# EAGLE board IR_Board (EAGLE 7.2.0)
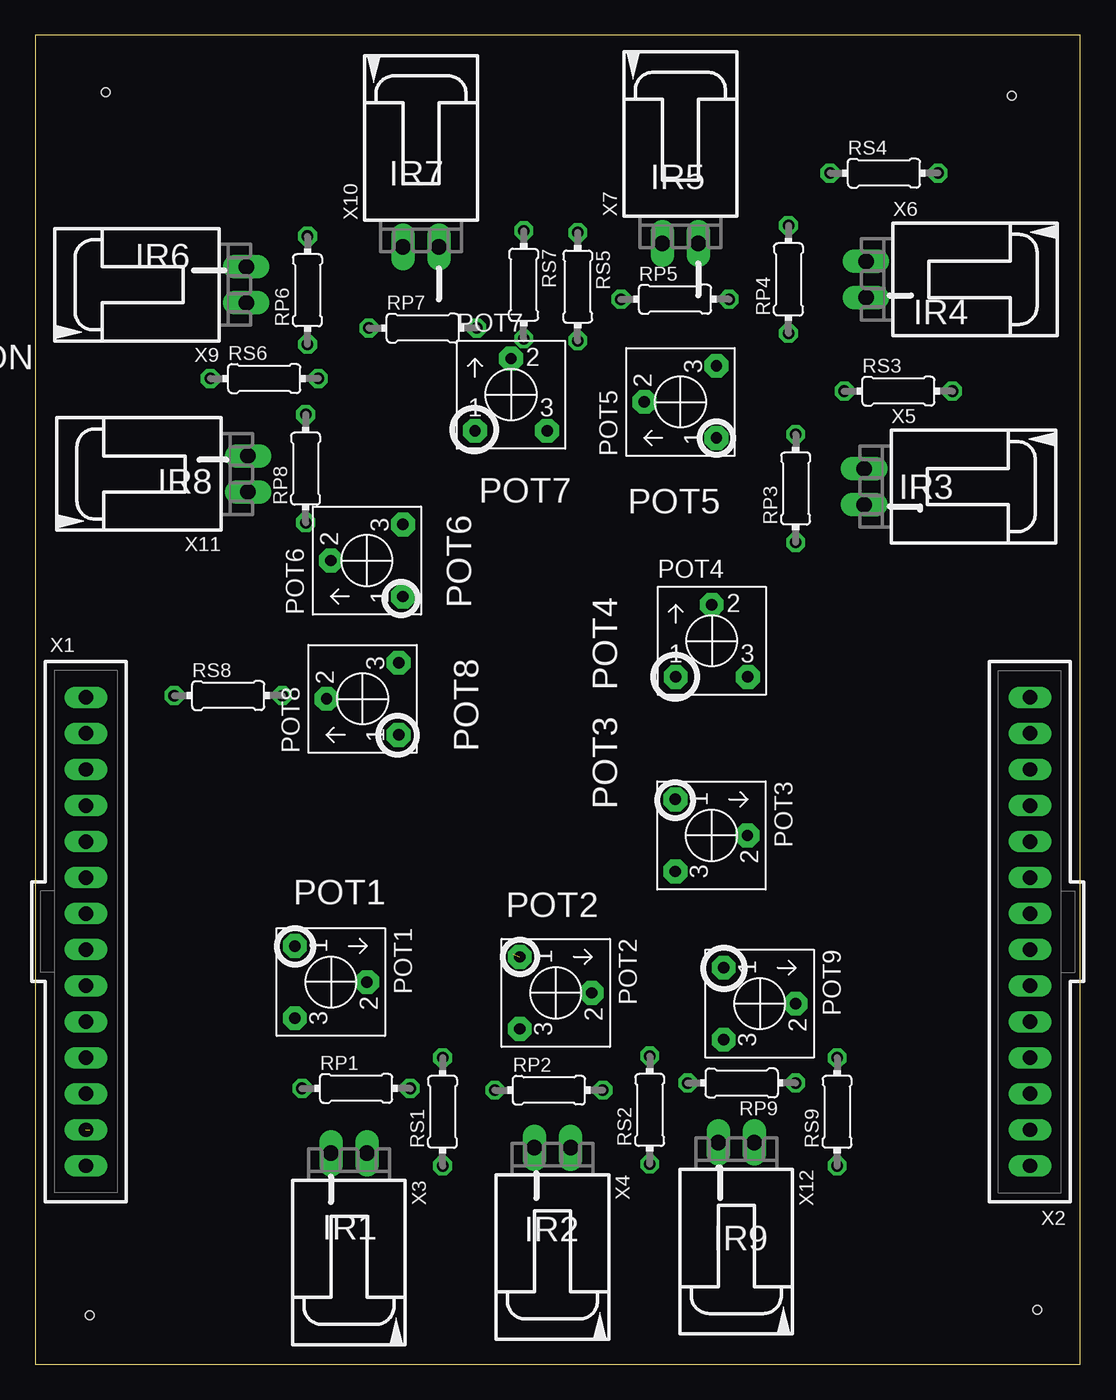
[diagram p0: board, top side]
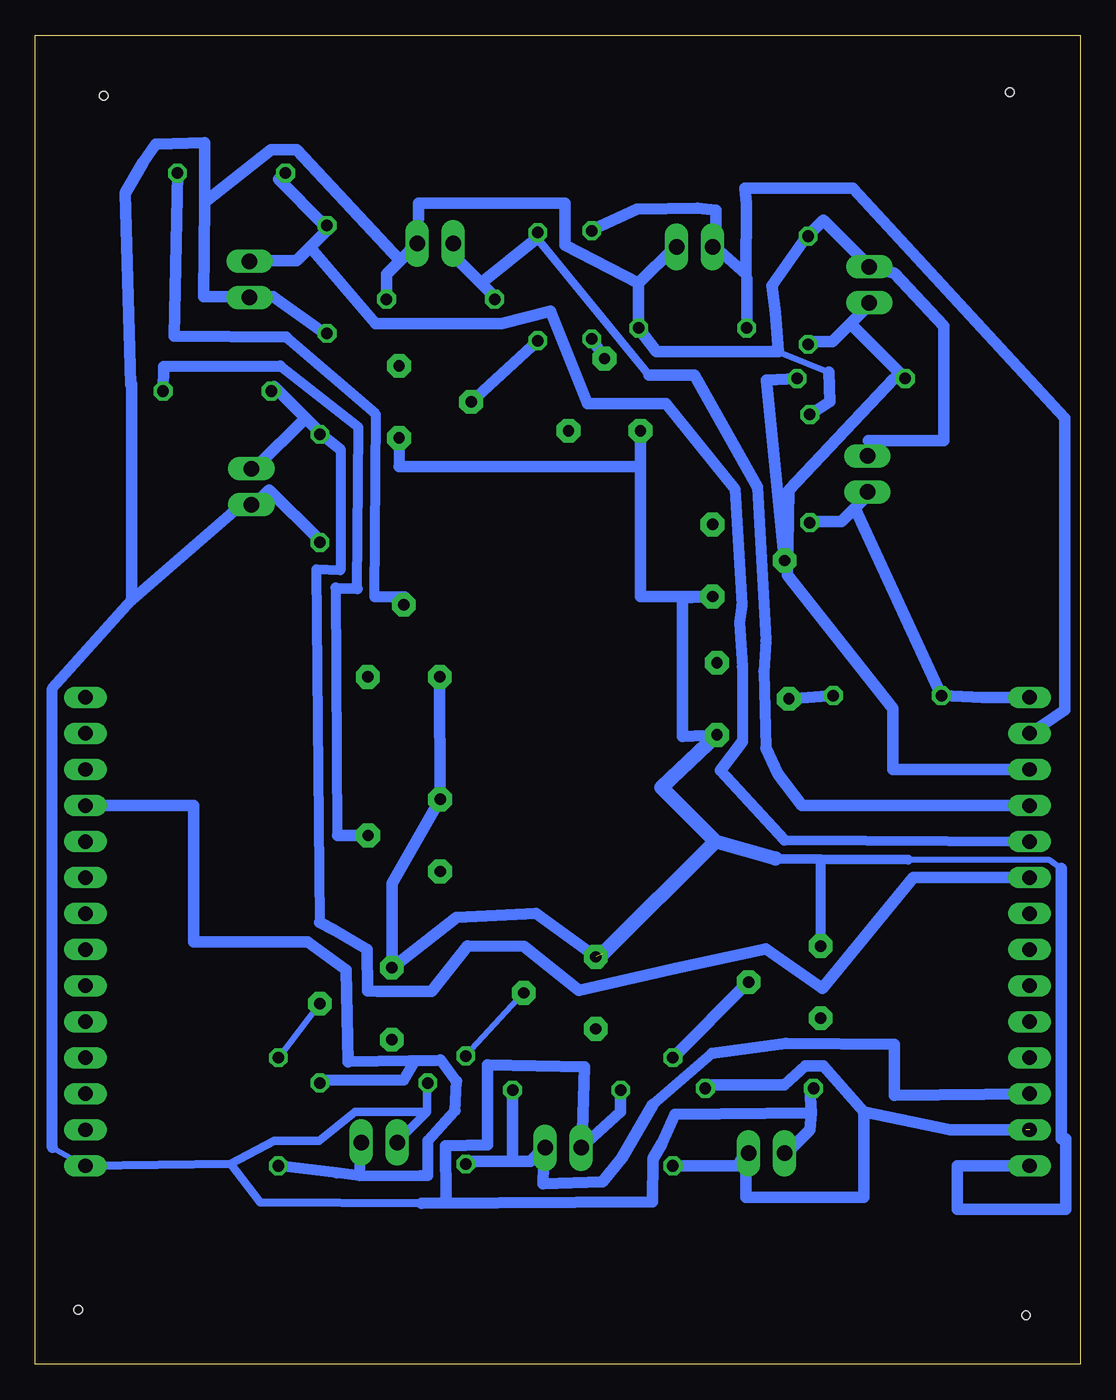
[diagram p1: board, bottom side, seen from below]

Size 73.64 x 93.65 mm. Coordinates in mm from the lower left corner, seen from the top.
Outline: 0,0 73.64,0 73.64,93.65 0,93.65 0,0
Copper layers (1*16): Top 0.035mm / dielectric 1.5mm / Bottom 0.035mm
Design rules "default": minimum track width 10mil, minimum drill 24mil, track to track 8mil, track to pad 8mil, pad to pad 8mil, via to via 8mil, smd to smd 8mil, copper to edge 40mil, drill to drill 8mil, minimum pad ring 10mil, minimum via ring 8mil, stop-mask expansion 4mil, vias tented up to drill 0mil, thermal gap 10mil
Net classes: 0 default: width 0.406 mm
Holes 0.6 mm at 4.95,89.66 68.83,89.41 70.61,3.81 3.81,3.43 3.81,3.43

## Footprints (pad centres in the part's own frame; a part is rotated, then mirrored left to right if it is on the bottom)
POTENTIOMETER_1 = drill 0.8 pad 1.676 octagon: 1 -2.54,0; 2 0,5.08; 3 2.54,0
0204/7 = drill 0.813 octagon: 1 -3.81,0; 2 3.81,0
70543-14 = drill 1.016 long: 1 -16.51,0; 2 -13.97,0; 3 -11.43,0; 4 -8.89,0; 5 -6.35,0; 6 -3.81,0; 7 -1.27,0; 8 1.27,0; 9 3.81,0; 10 6.35,0; 11 8.89,0; 12 11.43,0; 13 13.97,0; 14 16.51,0
70553-02 = drill 1.092 long: 1 -1.27,-7.62; 2 1.27,-7.62

## Placement (x,y rotation side)
POT1  POTENTIOMETER_1  [POTENTIOMETER_1]  18.29,26.92 270 top
POT2  POTENTIOMETER_1  [POTENTIOMETER_1]  34.14,26.16 270 top
POT3  POTENTIOMETER_1  [POTENTIOMETER_1]  45.11,37.26 270 top
POT4  POTENTIOMETER_1  [POTENTIOMETER_1]  47.68,48.44 0 top
POT5  POTENTIOMETER_1  [POTENTIOMETER_1]  48.01,67.82 90 top
POT6  POTENTIOMETER_1  [POTENTIOMETER_1]  25.91,56.64 90 top
POT7  POTENTIOMETER_1  [POTENTIOMETER_1]  33.53,65.79 0 top
POT8  POTENTIOMETER_1  [POTENTIOMETER_1]  25.6,46.89 90 top
POT9  POTENTIOMETER_1  [POTENTIOMETER_1]  48.51,25.4 270 top
RP1  [0204/7]  22.61,19.43 0 top
RP2  [0204/7]  36.2,19.3 0 top
RP3  [0204/7]  53.59,61.72 90 top
RP4  [0204/7]  53.09,76.45 90 top
RP5  [0204/7]  45.09,75.06 0 top
RP6  [0204/7]  19.18,75.69 90 top
RP7  [0204/7]  27.3,73.03 0 top
RP8  [0204/7]  19.05,63.12 90 top
RP9  [0204/7]  49.78,19.81 180 top
RS1  [0204/7]  28.7,17.78 90 top
RS2  [0204/7]  43.31,17.91 90 top
RS3  [0204/7]  60.83,68.58 0 top
RS4  [0204/7]  59.82,83.95 0 top
RS5  [0204/7]  38.23,75.95 270 top
RS6  [0204/7]  16.13,69.47 0 top
RS7  [0204/7]  34.42,76.07 270 top
RS8  [0204/7]  13.59,47.12 0 top
RS9  [0204/7]  56.52,17.78 90 top
X1  C-GRID-14-70543  [70543-14]  3.56,30.48 270 top
X2  C-GRID-14-70543  [70543-14]  70.1,30.48 90 top
X3  C-GRID-02-70553  [70553-02]  22.1,7.24 180 top
X4  C-GRID-02-70553  [70553-02]  36.45,7.62 180 top
X5  C-GRID-02-70553  [70553-02]  66.04,61.85 270 top
X6  C-GRID-02-70553  [70553-02]  66.17,76.45 270 top
X7  C-GRID-02-70553  [70553-02]  45.47,86.61 0 top
X9  C-GRID-02-70553  [70553-02]  7.24,76.07 90 top
X10  C-GRID-02-70553  [70553-02]  27.18,86.36 0 top
X11  C-GRID-02-70553  [70553-02]  7.37,62.74 90 top
X12  C-GRID-02-70553  [70553-02]  49.4,8 180 top

## Library data of the parts
POT1-POT9 = ben_kramer
RP1-RP9 RS1-RS9 = eagle-ltspice; SPICEMODEL: NONE; SPICEPREFIX: R
X1-X7 X9-X12 = con-molex; OC_FARNELL: unknown; OC_NEWARK: unknown

## Nets
5V: POT1.1 POT2.1 POT3.1 POT4.1 POT5.1 POT6.1 POT7.1 POT8.1 POT9.1 X1.14
GND: RP1.1 RP2.1 RP3.1 RP4.1 RP5.2 RP6.2 RP7.2 RP8.2 RP9.2 X2.1 X3.2 X4.2 X5.2 X6.2 X7.2 X9.2 X10.2 X11.2 X12.2
IR1: RP1.2 RS1.1 X1.13 X3.1
IR2: RP2.2 RS2.1 X1.12 X4.1
IR3: RP3.2 RS3.1 X1.6 X5.1
IR4: RP4.2 RS4.1 X1.5 X6.1
IR5: RP5.1 RS5.1 X1.4 X7.1
IR6: RP6.1 RS6.1 X1.3 X9.1
IR7: RP7.1 RS7.1 X1.2 X10.1
IR8: RP8.1 RS8.1 X1.1 X11.1
IR9: RP9.1 RS9.1 X2.11 X12.1
N$1: POT1.2 RS1.2
N$2: POT3.2 RS3.2
N$3: POT2.2 RS2.2
N$4: POT5.2 RS5.2
N$5: POT6.2 RS6.2
N$6: POT7.2 RS7.2
N$7: POT9.2 RS9.2
N$8: POT8.2 RS8.2
N$9: POT4.2 RS4.2

## Tracks (layer width: path | path; a pad name or v marks a point on that pad's centre or on a via)
5V  (1 unrouted)
  Bottom 0.406: 1.31,34.92 2.22,35.56 12.13,35.56 | 3.49,13.97 X1.14 | 1.31,15.88 1.02,15.88 | POT1.1
  Bottom 0.711: 21.46,35.62 18.28,35.6 | 18.28,35.6 12.13,35.56 | POT1.1 18.28,35.6
  Bottom 0.762: POT5.1 48.01,63.25
  Bottom 0.813: 1.31,34.92 1.31,15.88 | 1.02,15.88 1.02,10.92 8.64,10.92 8.64,13.97 X1.14 | POT2.1 38.35,31.75 43.94,31.5 POT9.1 48.51,33.88 POT3.1 POT4.1 | 48.01,63.25 30.99,63.25 POT7.1 30.99,54.1 POT6.1 28.04,54 28.04,44.25 POT8.1
  Bottom 1.016: 25.72,36.83 29.53,40.64 POT8.1 | 25.72,36.83 21.46,35.62 | 33.66,28.89 25.72,36.83
GND
  Bottom 0.406: 17.72,69.91 20.84,71.17 21.54,71.42 | 19.37,79.38 RP6.2 | 14.92,77.47 X9.2 | 14.92,65.09 14.92,64.14 | 53.34,72.71 RP4.1 | 58.42,75.25 X6.2 58.74,75.25 | 28.57,78.74 X10.2 | 46.67,79.06 X7.2 | 53.66,58.1 RP3.1 | 20.64,14.92 X3.2 | 46.42,11.32 44.68,11.65 | 72.45,15.24 70.17,13.97 X2.1 | 66.86,69.09 66.93,69.03 | 34.92,15.24 35.12,15.3 X4.2 34.92,15.24
  Bottom 0.61: 46.04,17.78 46.04,19.68 RP9.2 | 46.04,17.78 47.94,15.88 X12.2 | 59.88,14.1 X2.1 | 59.88,14.1 56.83,15.75 53.66,15.75 51.12,17.78 46.04,17.78 | 46.42,11.32 57.78,11.39 59.88,14.1
  Bottom 0.762: 66.86,53.85 72.45,47.62 72.45,15.24
  Bottom 0.813: RP8.2 17.65,67.84 17.72,69.91 | 21.27,71.37 21.46,74.11 21.72,76.01 19.37,79.38 | 21.27,71.37 21.54,71.42 | 14.92,77.47 18.1,80.64 19.05,79.69 RP6.2 | 14.92,65.09 9.59,65.09 9.59,73.15 13.08,76.9 X9.2 | 14.92,64.14 X11.2 | 53.34,72.71 56.9,75.25 58.42,75.25 | RP5.2 48.9,76.83 47.94,77.79 | X7.2 47.94,77.79 | 31.11,76.2 RP7.2 29.84,71.37 21.27,71.37 | 28.57,78.74 31.11,76.2 | 46.67,79.06 46.67,79.38 46.65,81.84 36.32,81.84 36.32,78.87 31.11,76.2 | 58.74,75.25 61.78,75.25 61.72,81.92 | 61.72,81.92 57.02,85.6 55.24,85.6 47.94,77.79 | 53.66,58.1 57.15,61.59 58.42,60.33 | RP2.1 32.38,17.78 35.12,15.3 34.92,20.95 41.78,21.08 41.78,15.44 44.73,15.39 44.68,11.65 | 18.92,17.72 19.05,16.51 20.64,14.92 | 18.92,17.72 19.05,19.37 RP1.1 | 18.92,17.72 28.57,17.59 29.46,15.56 30.1,14.48 30.15,11.44 46.42,11.32 | 58.42,60.33 59.37,60.33 66.86,53.85 66.86,69.09 | 58.42,60.33 X5.2 | 61.72,81.92 61.72,86.11 65.15,85.98 66.04,84.71 67.31,82.55 66.93,69.03
IR1  (1 unrouted)
  Bottom 0.406: 23.5,14.61 23.56,15.05 X3.1
  Bottom 0.813: RS1.1 24.13,13.97 23.56,15.05 23.56,11.75 15.24,11.75 15.24,17.78 | 23.5,14.61 X3.1 | 15.24,17.78 9.14,16.51 3.81,16.51 | 15.24,17.78 18.1,21.02 19.37,21.02 20.83,19.68 26.35,19.68 RP1.2
IR2
  Bottom 0.406: 37.78,15.24 X4.1
  Bottom 0.61: 43.18,14.29 RS2.1
  Bottom 0.711: 30.12,18.31 25.96,21.89
  Bottom 0.813: 40.01,14.29 38.73,14.29 37.78,15.24 37.85,12.69 33.67,12.84 32.31,14.53 30.12,18.31 | 40.01,14.29 43.18,14.29 | 40.01,14.29 RP2.2 | X1.12 13.08,18.92 13.08,22.54 20.73,22.59 25.96,21.89
IR3
  Bottom 0.406: 57.15,68.58 56.83,68.9 | 53.66,65.72 RP3.2 | 58.1,63.18 58.42,63.18
  Bottom 0.711: 53.59,31.11 53.85,56.01 52.13,55.94 52.13,64.45
  Bottom 0.762: 53.34,65.41 52.13,64.45
  Bottom 0.813: 56.83,68.9 54.61,66.67 | 54.61,66.67 53.66,65.72 | 57.15,68.58 RS3.1 | X1.6 11.75,34.29 18.16,26.48 22.16,29.27 28.51,27.88 35.31,26.35 39.19,29.44 43.18,29.46 45.72,26.25 49.51,26.25 50.23,26.29 50.27,29.23 52.58,30.61 53.59,31.11 | 53.34,65.41 RP3.2 | 54.61,66.67 58.1,63.18 | 58.42,63.18 X5.1
IR4
  Bottom 0.406: 56.52,83.5 56.2,83.82 RS4.1 | 53.34,80.33 RP4.2 53.02,80.01 | 58.42,77.79 X6.1
  Bottom 0.711: 20.83,36.96 X1.5
  Bottom 0.762: 23.81,43.88 23.81,49.15 24,52.26 23.84,53.49 24.32,61.66 29.21,67.69
  Bottom 0.813: 56.52,83.5 53.34,80.33 | 20.83,36.96 25.34,41.85 23.81,43.88 | 29.21,67.69 34.73,67.69 37.34,74.23 40.77,73.34 49.66,73.34 54.29,78.74 | 53.02,80.01 54.29,78.74 | 58.42,77.79 55.24,77.79 54.29,78.74
IR5
  Bottom 0.406: 41.27,75.25 RP5.1 | 44.13,78.74 X7.1 | 38.42,79.69 38.48,79.69 38.29,79.38
  Bottom 0.61: 38.29,79.38 30.39,69.7
  Bottom 0.762: 22.16,43.43 22.29,48.83 22.16,50.99 22.75,61.81
  Bottom 0.813: 42.23,76.2 44.45,78.42 44.13,78.74 | 42.23,76.2 41.27,75.25 | 42.23,76.2 38.29,79.38 | 38.42,79.69 RS5.1 | X1.4 19.6,39.37 21.31,41.59 22.16,43.43 | 22.75,61.81 27.18,69.72 30.39,69.7
IR6
  Bottom 0.406: 13.14,69.47 RS6.1
  Bottom 0.813: 16.19,73.34 RS6.1 | 16.19,73.34 14.92,74.61 X9.1 | 16.19,73.34 17.46,72.07 19.05,72.07 RP6.1 | X1.3 13.21,41.91 13.18,46.2 20.64,55.63 20.51,61.59 13.14,69.47
IR7
  Bottom 0.406: 23.56,76.83 23.5,76.52 | 34.29,80.01 RS7.1 | 25.72,78.74 X10.1 | 3.49,44.45 X1.2
  Bottom 0.813: 23.5,76.52 RP7.1 | 34.29,80.01 31.24,81.41 26.99,81.47 25.65,81.34 25.72,78.74 23.56,76.83 23.52,81.79 23.62,82.87 16,82.87 1.08,66.67 1.08,46.1 3.49,44.45
IR8
  Bottom 0.406: 19.05,59.37 RP8.1
  Bottom 0.813: 15.88,60.33 RS8.1 6.86,46.99 X1.1 | 15.88,60.33 14.92,61.28 X11.1 | 19.05,59.37 16.83,59.37 15.88,60.33
IR9
  Bottom 0.406: 45.09,21.46 45.4,21.21 | 45.4,21.21 46.99,21.21 | 53.34,20 RP9.1 | 45.4,21.21 45.21,21.4
  Bottom 0.762: RS9.1 52.39,13.46 50.8,13.27 | 53.34,20 47.69,20 46.99,21.21 | 45.09,21.46 43.94,19.94 44.04,17.86 45.97,15.75 45.97,13.28 46.52,13.28 50.8,13.27 | 50.8,13.27 X12.1 | 45.21,21.4 51.59,21.3
  Bottom 0.813: X2.11 62.48,39.37 62.48,29.77 54.45,29.77 51.74,27.79 51.59,21.3
N$1
  Bottom 0.813: POT1.2 RS1.2
N$2
  Bottom 0.711: 52.35,37.26 52.45,54.71 | 50.95,54.66 50.88,66.02 56.39,70.36
  Bottom 0.762: 52.45,54.71 50.95,54.66
  Bottom 0.813: POT3.2 52.35,37.26 | 56.39,70.36 64.62,70.31 RS3.2
N$3
  Bottom 0.406: POT2.2 RS2.2
N$4
  Bottom 0.813: POT5.2 RS5.2
N$5
  Bottom 0.813: POT6.2 22.1,69.34 RS6.2
N$6
  Bottom 0.813: RS7.2 POT7.2
N$7
  Bottom 0.406: POT9.2 RS9.2
N$8
  Bottom 0.813: RS8.2 POT8.2
N$9
  Bottom 0.406: POT4.2 47.6,54.08
  Bottom 0.711: 49.73,54.08 49.63,66.95 55.98,72.39
  Bottom 0.762: 47.6,54.08 49.73,54.08
  Bottom 0.813: 55.98,72.39 63.86,72.44 RS4.2

## Text on the board
tNames: IR7 | IR5 | IR6 | 1. Lines on IR pads indicate GROUND (EMITTER) pad | IR4 | 2. Circles on potentiometer pads indicate 5V CONNECTION | IR8 | POT5 | POT7 | IR3 | POT6 | POT4 | POT8 | POT3 | POT1 | POT2 | IR1 | IR2 | IR9